# EAGLE board Wrist (EAGLE 8.6.0)
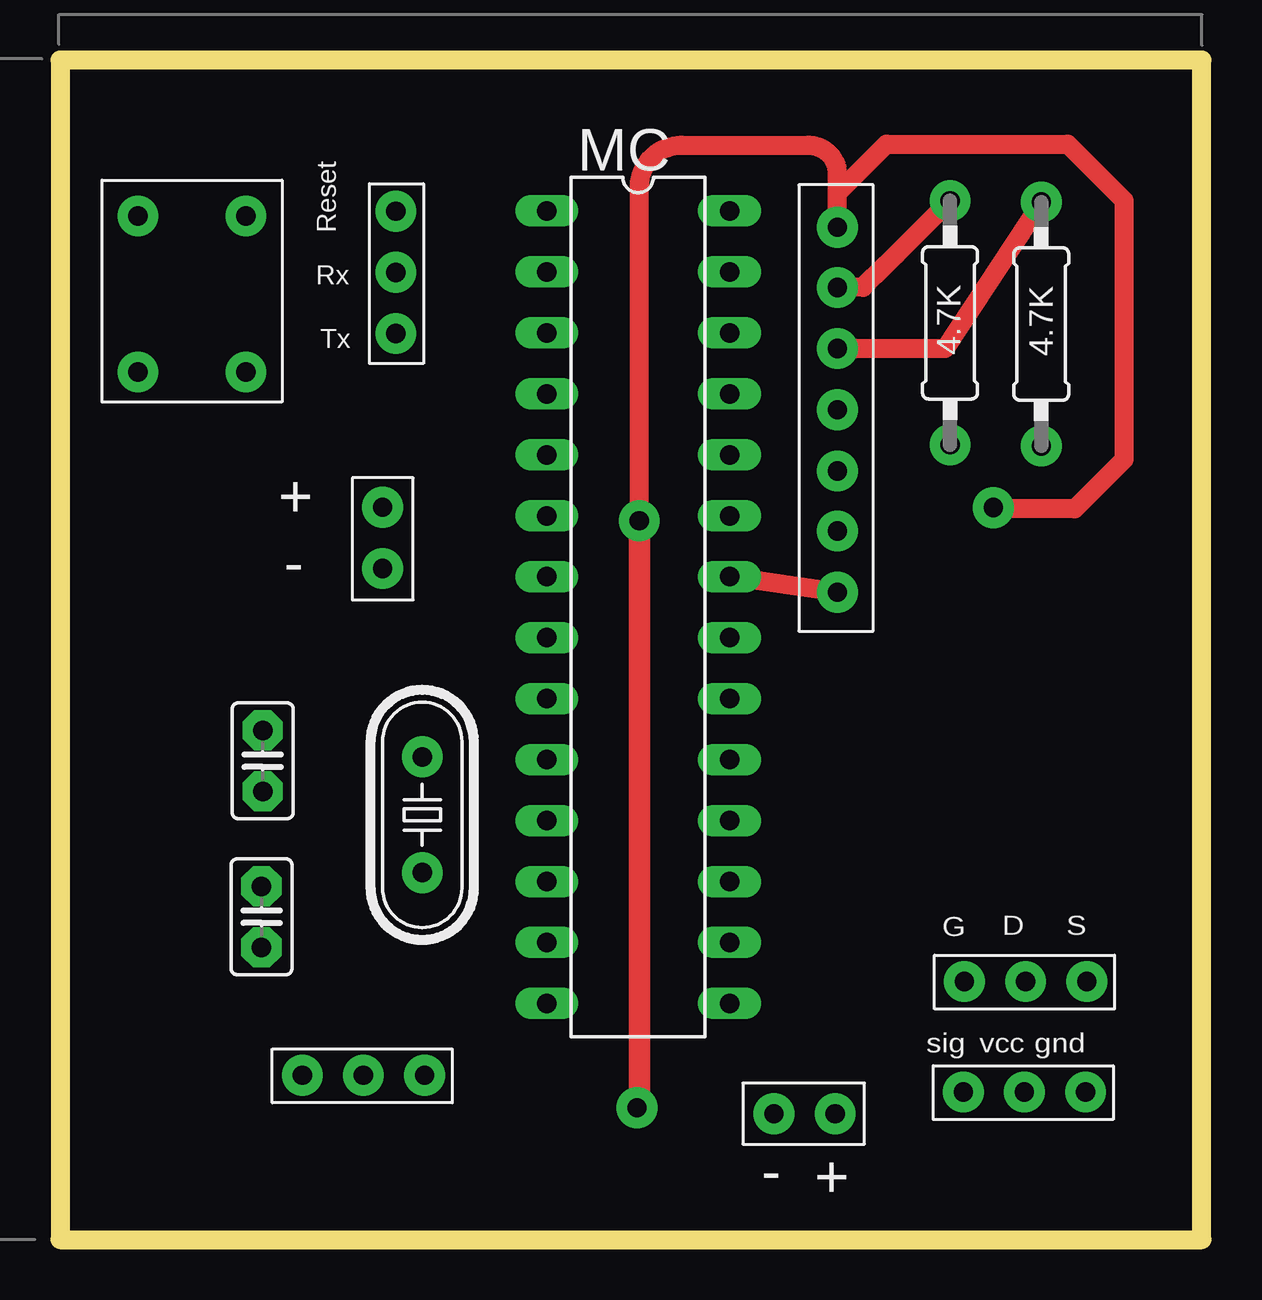
[diagram p0: board, top side]
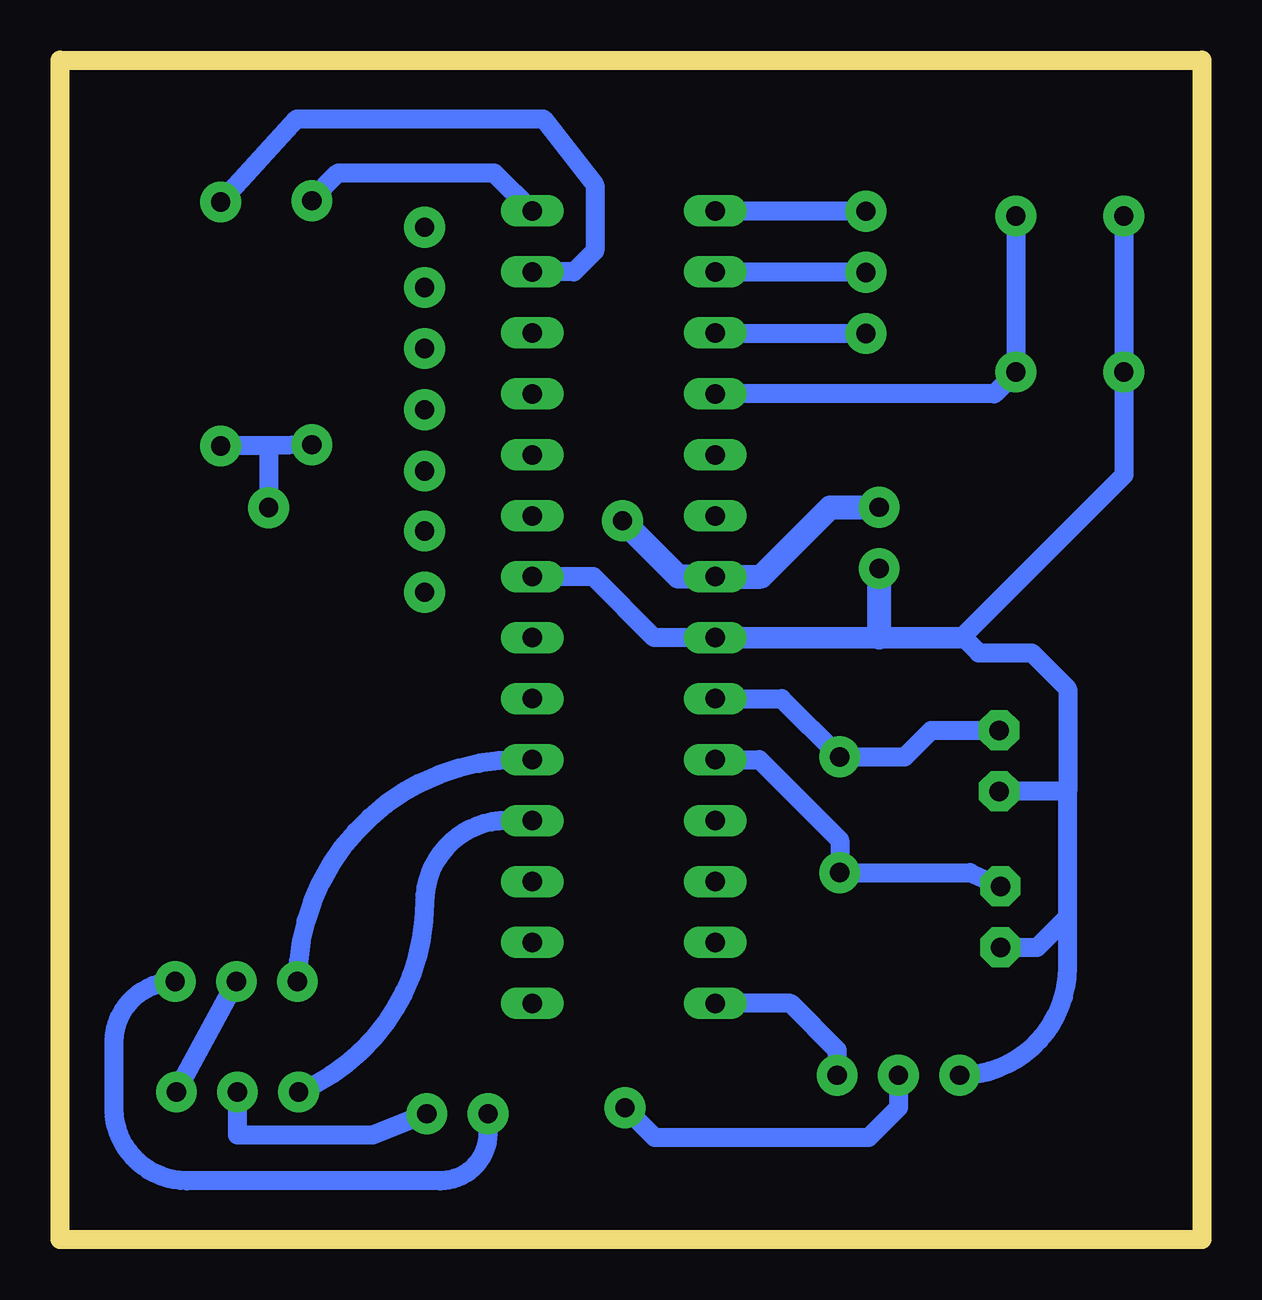
[diagram p1: board, bottom side, seen from below]

Size 47.6 x 49.15 mm. Coordinates in mm from the lower left corner, seen from the top.
Outline: 0,49.15 0,0 47.6,0 47.6,49.15 0,49.15
Copper layers (1*16): Top 0.035mm / dielectric 1.5mm / Bottom 0.035mm
Design rules "default": minimum track width 6mil, minimum drill 0.35mm, track to track 6mil, track to pad 6mil, pad to pad 6mil, via to via 6mil, smd to smd 6mil, copper to edge 40mil, drill to drill 6mil, minimum pad ring 10mil, minimum via ring 8mil, stop-mask expansion 4mil, vias tented up to drill 0mil, thermal gap 10mil

## Footprints (pad centres in the part's own frame; a part is rotated, then mirrored left to right if it is on the bottom)
C025-025X050 = drill 0.813 pad 1.676 octagon: 1 -1.27,0; 2 1.27,0
PIN_HEADER_2X1_GP = drill 0.8 pad 1.7: P$1 -1.31,0; P$2 1.24,0
PIN_HEADER_3X1_GP = drill 0.8 pad 1.7: P$1 0,0; P$2 2.55,0; P$3 -2.55,0
PIN_HEADER_7X1_GP = drill 0.8 pad 1.7: P$1 -3.825,0; P$2 -1.275,0; P$3 1.275,0; P$4 3.825,0; P$5 6.325,0; P$6 -6.325,0; P$7 -8.875,0
0207/10 = drill 0.8 pad 1.7: 1 -5.08,0; 2 5.08,0
HC49/S = drill 0.813 pad 1.7: 1 -2.413,0; 2 2.413,0
PUSH_BUTTON = drill 0.8 pad 1.7: P$1 -2.25,3.25; P$2 2.25,3.25; P$3 2.25,-3.25; P$4 -2.25,-3.25
DIL28-3$ = drill 0.813 long: 1 -16.51,-3.81; 2 -13.97,-3.81; 3 -11.43,-3.81; 4 -8.89,-3.81; 5 -6.35,-3.81; 6 -3.81,-3.81; 7 -1.27,-3.81; 8 1.27,-3.81; 9 3.81,-3.81; 10 6.35,-3.81; 11 8.89,-3.81; 12 11.43,-3.81; 13 13.97,-3.81; 14 16.51,-3.81; 15 16.51,3.81; 16 13.97,3.81; 17 11.43,3.81; 18 8.89,3.81; 19 6.35,3.81; 20 3.81,3.81; 21 1.27,3.81; 22 -1.27,3.81; 23 -3.81,3.81; 24 -6.35,3.81; 25 -8.89,3.81; 26 -11.43,3.81; 27 -13.97,3.81; 28 -16.51,3.81

## Placement (x,y rotation side)
E$1  [C025-025X050]  8.45,19.95 270 top
E$2  [PIN_HEADER_2X1_GP]  31,5.25 180 top
E$3  [PIN_HEADER_2X1_GP]  13.45,29.2 270 top
E$4  [PIN_HEADER_3X1_GP]  12.65,6.85 0 top
E$12  [PIN_HEADER_3X1_GP]  40.25,10.75 0 top
E$13  [PIN_HEADER_3X1_GP]  40.2,6.15 0 top
E$15  [PIN_HEADER_3X1_GP]  14,40.3 90 top
E$16  [PIN_HEADER_7X1_GP]  32.4,35.85 90 top
E$17  [0207/10]  37.1,38.2 270 top
E$18  [0207/10]  40.9,38.15 270 top
E$20  [C025-025X050]  8.4,13.45 270 top
E$22  [HC49/S]  15.1,17.7 90 top
E$23  [PUSH_BUTTON]  5.5,39.4 180 top
MC  [DIL28-3$]  24.1,26.35 270 top

## Library data of the parts
E$1 E$17 E$18 E$20 E$22 = adafruit
E$2-E$4 E$12 E$13 E$15 E$16 E$23 = custom components
MC = avr-6

## Nets
S$1: E$3.P$1 E$4.P$1 E$16.P$5 E$17.2 E$18.2 MC.7
S$2: E$2.P$2 E$12.P$2
S$3: E$1.2 E$3.P$2 E$4.P$3 E$16.P$7 E$20.2 E$23.P$2 E$23.P$3 MC.8 MC.22
S$4: E$2.P$1 E$13.P$1
S$8: E$1.1 E$22.2 MC.9
S$13: E$20.1 E$22.1 MC.10
S$15: E$4.P$2 MC.14
S$16: E$23.P$1 E$23.P$4 MC.4
S$17: E$15.P$2 MC.1
S$18: E$15.P$1 MC.2
S$19: E$15.P$3 MC.3
S$21: E$16.P$4 E$17.1 MC.28
S$22: E$16.P$3 E$18.1 MC.27
S$23: E$12.P$3 MC.19
S$25: E$12.P$1 E$13.P$2
S$26: E$13.P$3 MC.18

## Tracks (layer width: path | path; a pad name or v marks a point on that pad's centre or on a via)
S$1  (via drill 0.8 pad 1.7)
  Top 0.8: 24.15,5.6 v24.05,5.5 | v38.9,30.5 38.95,30.45 42.3,30.45 44.35,32.5 44.35,43.3 42,45.65 34.45,45.65 32.4,43.6 E$16.P$5 32.4,44.4 arc90 31.2,45.6 25.9,45.6 arc90 24.15,43.85 v24.15,29.95
  Top 0.9: v24.15,29.95 24.15,5.6
  Bottom 0.8: E$4.P$1 12.65,5.5 13.9,4.25 22.8,4.25 v24.05,5.5 | 38.9,33.07 E$18.2 | 38.9,33.07 v38.9,30.5 | E$17.2 38.9,33.07
  Bottom 1: v24.15,29.95 21.82,27.62 MC.7 18.38,27.62 15.49,30.51 E$3.P$1
S$2
  Bottom 0.8: E$2.P$2 29.76,4.44 arc90 31.75,2.45 42.3,2.45 arc90 45.35,5.5 45.35,8.2 arc90 E$12.P$2
S$3
  Top 0.8: E$16.P$7 MC.22
  Bottom 0.8: E$23.P$3 E$23.P$2 3.25,31.85 10.02,25.08 9.93,25.08 9.3,24.45 7.1,24.45 5.6,22.95 5.6,18.68 | MC.22 25.37,27.62 22.83,25.08 MC.8 | E$20.2 6.87,12.18 5.6,13.45 | 5.6,13.45 5.6,18.68 | 5.6,18.68 E$1.2 | E$4.P$3 arc-90 5.6,11.35 5.6,13.45
  Bottom 0.9: MC.8 13.45,25.08 10.02,25.08
  Bottom 1: 13.45,25.08 E$3.P$2
S$4
  Bottom 0.8: E$2.P$1 34.56,4.35 40.2,4.35 E$13.P$1
S$8
  Bottom 0.8: MC.9 17.53,22.54 E$22.2 12.39,20.11 11.28,21.22 E$1.1
S$13
  Bottom 0.8: MC.10 18.45,20 15.1,16.65 E$22.1 9.67,15.29 E$20.1
S$15
  Bottom 0.8: E$4.P$2 15.2,7.9 17.14,9.84 MC.14
S$16
  Bottom 0.8: E$23.P$4 E$23.P$1 8.66,35.24 MC.4
S$17
  Bottom 0.8: E$15.P$2 MC.1
S$18
  Bottom 0.8: E$15.P$1 20.27,40.3 MC.2
S$19
  Bottom 0.8: E$15.P$3 20.26,37.75 MC.3
S$21
  Top 0.8: E$17.1 34.85,41.03 34.4,40.6 33.48,39.67 E$16.P$4
  Bottom 0.8: E$17.1 37.1,43.35 36,44.45 29.5,44.45 MC.28
S$22
  Top 0.8: E$18.1 36.9,37.12 E$16.P$3
  Bottom 0.8: E$18.1 37.73,46.7 27.45,46.7 25.3,43.95 25.3,41.2 26.18,40.32 MC.27
S$23
  Bottom 0.8: MC.19 28.45,20 arc-90 E$12.P$3
S$25
  Bottom 0.8: E$13.P$2 E$12.P$1
S$26
  Bottom 0.8: MC.18 28.99,17.46 arc-90 32.4,14.05 arc67 E$13.P$3

## Text on the board
tPlace: Reset | Rx | Tx | 4.7K | 4.7K | + | - | G | D | S | sig | vcc | gnd | - | +
209bmp: Max | push button | power | Servo